# Altium PCB PCB1.PcbDoc (part 2 of 2)
Units mm, origin at the board's own origin, x right, y up, seen from the top; angles counter-clockwise.
Board outline 103.5 x 62.7 mm, 4 copper layers (Top Layer, Int1 (GND), Int2 (PWR), Bottom Layer), stack 1.369 mm thick; 71 components, 120 nets, 440 pads, 282 vias.
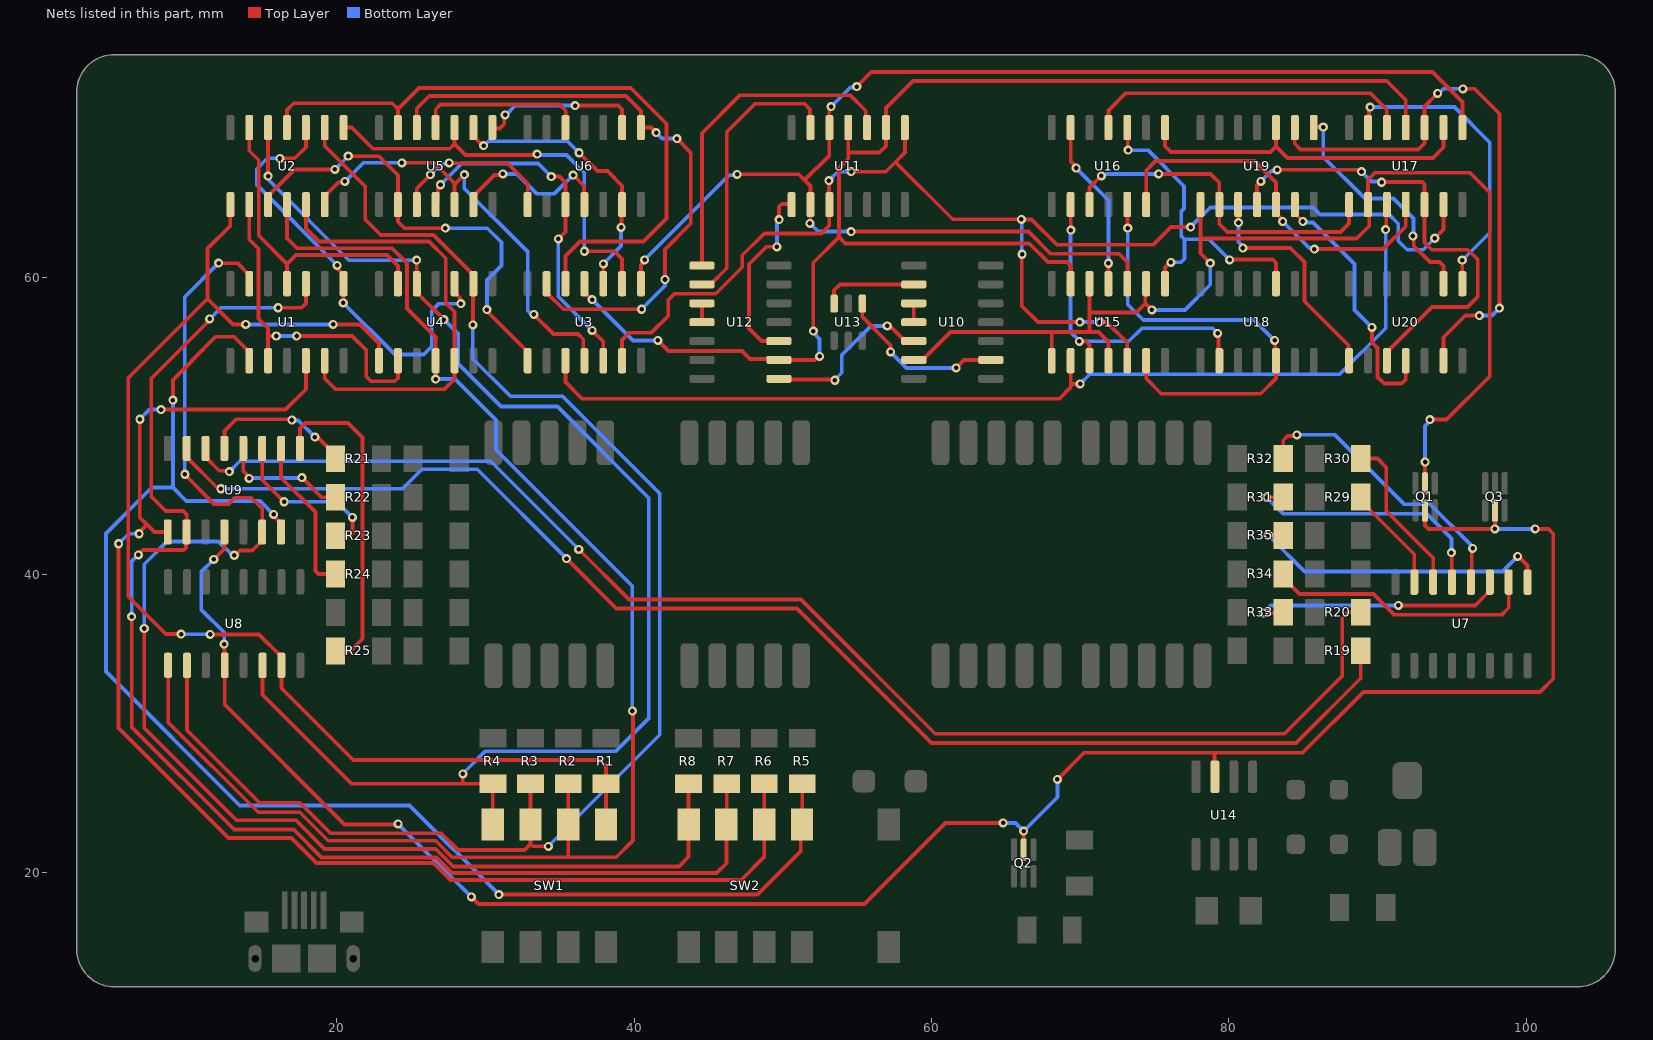
[diagram p4: the nets of this part, all layers, seen from the top]

## Via types
v1: diameter 0.61, hole 0.305, Top Layer to Bottom Layer, 282 vias

## Nets (pads, with @x,y where several pads share a name; then routed paths per layer and width w, separated by ;. In a path a pad name is that pad's centre, name@x,y a point inside that pad or via, vN(x,y) a via of type N, cw(c..) or ccw(c..) an arc to the next point about the centre after c; other vN are vias at no path point) (continued)
NetR19_2: R19.2 U9.15 | length 92.3
  Top Layer w0.254: U9.15@9.9,48.511 9.9,47.927 11.959,45.868 12.132,45.868 v1(12.2,45.8) ; v1(35.45,41.1) 38.8,37.75 50.95,37.75 60,28.7 84.525,28.7 88.875,33.05 R19.2@88.875,34.901
  Bottom Layer w0.254: v1(12.2,45.8) 24.425,45.8 25.732,47.107 29.443,47.107 v1(35.45,41.1)
NetR20_2: R20.2 U9.14 | length 92.3
  Top Layer w0.254: U9.14@11.17,48.511 11.17,47.927 12.089,47.007 12.718,47.007 v1(12.775,46.95) ; v1(36.275,41.725) 39.65,38.35 51.225,38.35 60.25,29.325 83.75,29.325 87.625,33.2 87.625,37.119 87.993,37.487 R20.2@88.875,37.487
  Bottom Layer w0.254: v1(12.775,46.95) 13.475,47.65 30.35,47.65 v1(36.275,41.725)
NetR21_2: R21.2 U9.13 | length 10.2
  Top Layer w0.254: U9.13@12.44,48.511 12.44,49.69 13.225,50.475 16.925,50.475 v1(16.975,50.425) ; v1(18.525,49.275) 18.593,49.207 18.767,49.207 19.908,48.065 R21.2@19.908,47.815
  Bottom Layer w0.254: v1(16.975,50.425) 17.006,50.394 17.406,50.394 v1(18.525,49.275)
NetR22_2: R22.2 U9.12 | length 8.5
  Top Layer w0.254: U9.12@13.71,48.511 13.71,46.986 14.1,46.596 v1(14.1,46.5) ; v1(17.65,46.55) 18.97,45.23 R22.2@19.908,45.23
  Bottom Layer w0.254: v1(14.1,46.5) 14.125,46.525 17.625,46.525 v1(17.65,46.55)
NetR23_2: R23.2 U9.11 | length 11.5
  Top Layer w0.254: U9.11@14.98,48.511 14.98,46.395 v1(16.45,44.925) ; R23.2@19.908,42.644 20.901,42.644 21.05,42.793 v1(21.05,43.875)
  Bottom Layer w0.254: v1(16.45,44.925) 20,44.925 v1(21.05,43.875)
NetR24_2: R24.2 U9.10 | length 10.6
  Top Layer w0.254: U9.10@16.25,48.511 16.25,46.545 18.565,44.23 18.565,40.26 18.766,40.059 R24.2@19.908,40.059
NetR25_2: R25.2 U9.9 | length 21.8
  Top Layer w0.254: U9.9@17.52,48.511 17.52,49.845 17.9,50.225 20.75,50.225 21.736,49.239 21.736,35.711 20.912,34.887 R25.2@19.908,34.887
NetR29_2: R29.2 U7.15 | length 7.2
  Top Layer w0.254: R29.2@88.875,45.243 88.875,44.993 92.475,41.393 U7.15@92.475,39.518
NetR30_2: R30.2 U7.14 | length 11
  Top Layer w0.254: R30.2@88.875,47.829 89.996,47.829 90.589,47.236 90.589,44.3 93.745,41.144 U7.14@93.745,39.518
NetR31_2: R31.2 U7.13 | length 17.7
  Top Layer w0.254: v1(82.541,45.229) 83.644,45.229 R31.2@83.658,45.243 ; v1(94.975,41.5) 94.995,41.48 94.995,39.538 U7.13@95.015,39.518
  Bottom Layer w0.254: v1(82.541,45.229) 83.645,44.125 93.3,44.125 94.975,42.45 v1(94.975,41.5)
NetR32_2: R32.2 U7.12 | length 19.7
  Top Layer w0.254: R32.2@83.658,47.829 83.658,49.058 83.957,49.357 84.507,49.357 v1(84.575,49.425) ; U7.12@96.285,39.518 96.342,39.575 96.342,41.736 v1(96.4,41.793)
  Bottom Layer w0.254: v1(84.575,49.425) 87.15,49.425 91.825,44.75 93.55,44.75 96.222,42.078 96.222,42.067 96.4,41.889 v1(96.4,41.793)
NetR33_2: R33.2 U7.11 | length 17.8
  Top Layer w0.254: v1(82.325,37.45) 83.622,37.45 R33.2@83.658,37.487 ; v1(91.4,37.95) 96.572,37.95 97.555,38.933 U7.11@97.555,39.518
  Bottom Layer w0.254: v1(82.325,37.45) 82.825,37.95 v1(91.4,37.95)
NetR34_2: R34.2 U7.10 | length 18.4
  Top Layer w0.254: R34.2@83.658,40.072 83.658,39.822 84.756,38.725 89.732,38.725 91.138,37.318 98.344,37.318 98.825,37.799 U7.10@98.825,39.518
NetR35_2: R35.2 U7.9 | length 21.3
  Top Layer w0.254: v1(82.65,42.675) 83.641,42.675 R35.2@83.658,42.658 ; v1(99.425,41.25) 99.475,41.25 100.095,40.63 U7.9@100.095,39.518
  Bottom Layer w0.254: v1(82.65,42.675) 85.1,40.225 98.4,40.225 v1(99.425,41.25)
NetU1_3: U1.3 U2.2 U4.2 | length 23.3
  Top Layer w0.254: U2.2@14.11,64.913 14.11,62.565 14.734,61.941 14.734,57.241 15.38,56.595 15.38,56.075 ; U1.3@15.38,54.413 15.38,56.075 ; v1(15.925,56.075) 15.38,56.075 ; v1(17.3,56.075) 21.025,56.075 21.975,55.125 21.975,53.35 22.3,53.025 23.9,53.025 24.11,53.235 U4.2@24.11,54.413
  Bottom Layer w0.254: v1(15.925,56.075) v1(17.3,56.075)
NetU1_6: U1.6 U2.5 U4.5 | length 30.7
  Top Layer w0.254: U2.5@17.92,64.913 17.92,63.305 18.8,62.425 26.2,62.425 27.326,61.299 27.326,58.299 27.92,57.705 U4.5@27.92,54.413 27.92,53.17 27.25,52.5 19.9,52.5 19.19,53.21 U1.6@19.19,54.413
NetU1_8: U1.8 U2.10 U4.10 | length 30.4
  Top Layer w0.254: v1(16.175,68.025) 17.175,68.025 17.92,68.77 U2.10@17.92,70.095 ; v1(20.025,60.825) 20.093,60.757 20.093,60.55 20.46,60.183 U1.8@20.46,59.595 20.447,59.582 20.447,58.316 v1(20.434,58.303) ; U4.10@27.92,59.595 27.92,59.007 28.282,58.645 28.282,58.318 v1(28.35,58.25)
  Bottom Layer w0.254: v1(16.175,68.025) 15.325,68.025 14.625,67.325 14.625,66.225 v1(20.025,60.825) ; v1(20.434,58.303) 23.912,54.825 25.85,54.825 26.387,55.363 26.387,57.762 26.875,58.25 v1(28.35,58.25)
NetU1_11: U1.11 U2.13 U4.13 | length 20.8
  Top Layer w0.254: U2.13@14.11,70.095 14.11,68.54 14.75,67.9 14.75,62.825 16.65,60.925 ; U1.11@16.65,59.595 16.65,60.925 ; U4.13@24.11,59.595 24.11,60.79 23.377,61.523 17.248,61.523 16.65,60.925
NetU2_3: U2.3 U3.1 U5.2 | length 31.1
  Top Layer w0.254: U2.3@15.38,64.913 15.38,65.498 17.157,67.275 v1(19.875,67.275) ; v1(20.768,68.168) 22.832,68.168 24.11,66.89 24.11,63.765 24.55,63.325 v1(27.3,63.325) ; v1(30.1,57.85) 30.168,57.782 30.168,57.669 32.84,54.998 U3.1@32.84,54.413
  Bottom Layer w0.254: v1@19.875,67.3 v1(19.875,67.275) v1(20.768,68.168) ; v1(27.3,63.325) 30.125,63.325 31.075,62.375 31.075,60.825 30.1,59.85 v1(30.1,57.85)
NetU2_6: U2.6 U3.4 U5.5 | length 30
  Top Layer w0.254: U2.6@19.19,64.913 19.19,65.498 20.099,66.407 20.482,66.407 v1(20.55,66.475) ; v1(24.375,67.725) 26.55,67.725 27.92,66.355 ; U5.5@27.92,64.913 27.92,66.27 v1(28.575,66.925) ; v1(33.25,57.525) 34.575,56.2 36.225,56.2 36.575,55.85 36.575,54.488 U3.4@36.65,54.413
  Bottom Layer w0.254: v1(20.55,66.475) 21.8,67.725 v1(24.375,67.725) ; v1(28.575,66.925) 28.575,66 32.85,61.725 32.85,57.775 33.1,57.525 v1(33.25,57.525)
NetU2_8: U2.8 U3.9 U5.10 | length 28.6
  Top Layer w0.254: U2.8@20.46,70.095 21.005,70.095 22.425,68.675 27.6,68.675 27.92,68.995 ; U5.10@27.92,70.095 27.92,68.995 ; v1(33.478,68.307) 33.421,68.25 28.665,68.25 27.92,68.995 ; v1(36.65,61.775) 38.675,61.775 39.19,61.26 U3.9@39.19,59.595
  Bottom Layer w0.254: v1(33.478,68.307) 33.535,68.25 35.45,68.25 36.65,67.05 v1(36.65,61.775)
NetU2_11: U2.11 U3.12 U5.13 | length 45.9
  Top Layer w0.254: U2.11@16.65,70.095 16.65,71.275 17.1,71.725 23.725,71.725 24.11,71.34 ; U5.13@24.11,70.095 24.11,71.34 ; U3.12@35.38,59.595 35.38,61.455 36.35,62.425 40.625,62.425 42.175,63.975 42.175,70.35 39.775,72.75 25.52,72.75 24.11,71.34
NetU5_3: U5.3 U6.1 | length 11.3
  Top Layer w0.254: U5.3@25.38,64.913 25.38,66.005 v1(26.3,66.925) ; v1(27.553,67.722) 27.575,67.7 31.475,67.7 32.84,66.335 U6.1@32.84,64.913
  Bottom Layer w0.254: v1(26.3,66.925) 27.029,67.654 27.485,67.654 v1(27.553,67.722)
NetU5_6: U5.6 U6.4 | length 11.3
  Top Layer w0.254: U5.6@29.19,64.913 29.19,65.498 30.599,66.907 31.107,66.907 v1(31.175,66.975) ; v1(35.9,66.9) 36.65,66.15 U6.4@36.65,64.913
  Bottom Layer w0.254: v1(31.175,66.975) 32.1,66.975 33.425,65.65 34.65,65.65 v1(35.9,66.9)
NetU5_8: U5.8 U6.9 | length 11
  Top Layer w0.254: U5.8@30.46,70.095 30.53,70.025 30.95,70.025 31.257,70.332 31.257,70.882 v1(31.325,70.95) ; v1(36.025,71.575) 38.925,71.575 39.19,71.31 U6.9@39.19,70.095
  Bottom Layer w0.254: v1(31.325,70.95) 31.375,70.95 32,71.575 v1(36.025,71.575)
NetU5_11: U5.11 U6.12 | length 11.4
  Top Layer w0.254: U5.11@26.65,70.095 26.65,71.325 26.975,71.65 34.975,71.65 35.4,71.225 35.4,70.115 U6.12@35.38,70.095
NetU10_2: U10.2 U13.6 | length 6.4
  Top Layer w0.254: U13.6@53.45,58.249 53.45,59.15 53.844,59.544 U10.2@58.809,59.544
NetU10_5: U10.5 U12.8 | length 11.8
  Top Layer w0.254: U12.8@49.741,53.194 49.788,53.147 53.453,53.147 v1(53.5,53.1) ; v1(57.025,56.75) 57.093,56.682 57.277,56.682 58.225,55.734 U10.5@58.809,55.734
  Bottom Layer w0.254: v1(53.5,53.1) 53.5,53.133 53.968,53.602 53.968,54.793 55.925,56.75 v1(57.025,56.75)
NetU10_9: U10.9 U13.4 | length 11.4
  Top Layer w0.254: U13.4@55.35,58.249 55.35,57.35 57.244,55.456 57.244,55.006 v1(57.25,55) ; v1(61.65,53.925) 62.189,54.464 U10.9@63.991,54.464
  Bottom Layer w0.254: v1(57.25,55) 58.325,53.925 v1(61.65,53.925)
NetU11_3: U11.3 U12.1 | length 22.6
  Top Layer w0.254: U12.1@44.559,60.814 44.559,69.709 47.125,72.275 54.525,72.275 55.575,71.225 55.575,70.19 U11.3@55.67,70.095
NetU11_6: U11.6 U12.2 | length 19.1
  Top Layer w0.254: U12.2@44.559,59.544 45.143,59.544 46.225,60.626 46.225,69.8 48.125,71.7 51.45,71.7 51.834,71.316 51.834,70.121 U11.6@51.86,70.095
NetU11_8: U11.8 U12.10 | length 12.7
  Top Layer w0.254: v1(49.6,62.075) 48.9,62.075 47.725,60.9 47.725,56.575 48.566,55.734 U12.10@49.741,55.734 ; v1(49.75,63.9) 49.75,64.775 49.925,64.95 50.553,64.95 U11.8@50.59,64.913
  Bottom Layer w0.254: v1(49.6,62.075) 49.6,63.654 49.75,63.804 v1(49.75,63.9)
NetU15_3: U15.3 U16.2 U18.2 | length 23
  Top Layer w0.254: U16.2@69.36,64.913 69.367,64.906 69.367,63.208 v1(69.375,63.2) ; v1@69.951,55.719 70.381,55.719 70.623,55.477 70.623,54.42 U15.3@70.63,54.413 ; v1(79.25,56.25) 79.305,56.195 79.305,54.468 U18.2@79.36,54.413
  Bottom Layer w0.254: v1(69.375,63.2) 69.353,63.178 69.353,56.347 69.95,55.75 v1(69.95,55.718) 73.268,55.718 74.15,56.6 78.9,56.6 v1(79.25,56.25)
NetU15_6: U15.6 U16.5 U18.5 | length 31
  Top Layer w0.254: U16.5@73.17,64.913 73.185,64.898 73.185,63.34 v1(73.2,63.325) ; U15.6@74.44,54.413 74.44,53.21 75.457,52.193 82.143,52.193 83.17,53.22 U18.5@83.17,54.413 83.123,54.461 83.123,55.727 v1(83.075,55.775)
  Bottom Layer w0.254: v1(73.2,63.325) 73.2,58.2 74.25,57.15 81.7,57.15 v1(83.075,55.775)
NetU15_8: U15.8 U16.10 U18.10 | length 22.2
  Top Layer w0.254: U16.10@73.17,70.095 73.197,70.067 73.197,68.602 v1(73.225,68.575) ; U15.8@75.71,59.595 75.71,60.685 76.05,61.025 v1(76.1,61.025) ; v1(80.05,61.2) 80.075,61.225 82.95,61.225 83.17,61.005 U18.10@83.17,59.595
  Bottom Layer w0.254: v1(73.225,68.575) 74.568,68.575 76.993,66.15 76.993,64.652 76.793,64.451 76.793,62.81 77.025,62.578 ; v1(76.1,61.025) 76.111,61.036 76.786,61.036 77.025,61.275 77.025,62.578 ; v1(80.05,61.2) 78.672,62.578 77.025,62.578
NetU15_11: U15.11 U16.13 | length 11.6
  Top Layer w0.254: U16.13@69.36,70.095 69.36,67.836 69.725,67.471 v1(69.725,67.375) ; U15.11@71.9,59.595 v1(71.9,60.968)
  Bottom Layer w0.254: v1(69.725,67.375) 71.9,65.2 v1(71.9,60.968)
NetU16_3: U16.3 U17.1 U19.2 | length 23.7
  Top Layer w0.254: U16.3@70.63,64.913 70.63,66.055 v1(71.425,66.85) ; v1(75.275,66.975) 78.775,66.975 79.36,66.39 U19.2@79.36,64.913 79.36,63.615 79.907,63.068 87.518,63.068 88.09,63.64 U17.1@88.09,64.913
  Bottom Layer w0.254: v1(71.425,66.85) 71.493,66.918 71.695,66.918 71.752,66.975 v1(75.275,66.975)
NetU16_6: U16.6 U17.4 U19.5 | length 25.8
  Top Layer w0.254: U16.6@74.44,64.913 74.44,67.215 75.075,67.85 81.725,67.85 83.17,66.405 U19.5@83.17,64.913 83.17,64.326 83.625,63.871 v1(83.625,63.775) ; v1(85.75,61.925) 90.375,61.925 91.9,63.45 U17.4@91.9,64.913
  Bottom Layer w0.254: v1(83.625,63.775) 85.407,61.993 85.682,61.993 v1(85.75,61.925)
NetU16_8: U16.8 U17.9 U19.10 | length 23.5
  Top Layer w0.254: U16.8@75.71,70.095 75.71,68.84 76.1,68.45 82.8,68.45 83.17,68.82 ; U19.10@83.17,70.095 83.17,68.82 ; U17.9@94.44,70.095 94.44,68.765 93.725,68.05 83.94,68.05 83.17,68.82
NetU16_11: U16.11 U17.12 | length 22
  Top Layer w0.254: U16.11@71.9,70.095 71.9,71.25 73.05,72.4 89.525,72.4 90.63,71.295 U17.12@90.63,70.095
NetU19_3: U19.3 U20.1 | length 15.5
  Top Layer w0.254: U19.3@80.63,64.913 80.64,64.903 80.64,63.71 v1(80.65,63.7) ; v1(80.95,61.993) 84.132,61.993 85.083,61.042 85.083,58.417 88.053,55.447 88.053,54.45 U20.1@88.09,54.413
  Bottom Layer w0.254: v1(80.65,63.7) 80.65,62.389 80.95,62.089 v1(80.95,61.993)
NetU19_6: U19.6 U20.4 | length 17.7
  Top Layer w0.254: U19.6@84.44,64.913 84.44,64.326 84.975,63.791 v1(84.975,63.775) ; v1(89.625,56.65) 89.625,55.65 90,55.275 90,53.325 90.45,52.875 91.625,52.875 91.9,53.15 U20.4@91.9,54.413
  Bottom Layer w0.254: v1(84.975,63.775) 85.036,63.714 85.661,63.714 88.45,60.925 88.45,57.825 v1(89.625,56.65)
NetU19_8: U19.8 U20.9 | length 16.1
  Top Layer w0.254: U19.8@85.71,70.095 85.74,70.125 v1(86.35,70.125) ; v1(92.375,62.8) 92.443,62.732 92.443,62.132 93.525,61.05 94.165,61.05 94.44,60.775 U20.9@94.44,59.595
  Bottom Layer w0.254: v1(86.35,70.125) 86.35,68.125 89.15,65.325 91.075,65.325 92.42,63.98 92.42,62.845 v1(92.375,62.8)
O1Y: U3.5 U5.4 U6.3 | length 24.4
  Top Layer w0.254: U5.4@26.65,64.913 26.786,65.049 26.786,65.965 26.975,66.154 v1(26.975,66.25) ; v1(34.425,66.8) 34.975,66.8 35.38,66.395 U6.3@35.38,64.913 35.38,63.09 34.9,62.61 v1(34.9,62.6) ; v1(37.175,56.45) 37.92,55.705 U3.5@37.92,54.413
  Bottom Layer w0.254: v1(26.975,66.25) 28.4,67.675 33.55,67.675 v1(34.425,66.8) ; v1(34.9,62.6) 34.9,58.725 v1(37.175,56.45)
O1Y1: U17.5 U19.4 U20.3 | length 32.1
  Top Layer w0.254: U19.4@81.9,64.913 81.9,66.225 v1(82.15,66.475) ; v1(83.25,67.25) 88.704,67.25 88.829,67.125 v1(88.925,67.125) ; v1(90.275,66.418) 90.282,66.425 93,66.425 93.17,66.255 U17.5@93.17,64.913 93.17,62.355 93.65,61.875 96.075,61.875 96.75,61.2 96.75,58.725 96.05,58.025 93.657,58.025 90.63,54.998 U20.3@90.63,54.413
  Bottom Layer w0.254: v1(82.15,66.475) 82.857,67.182 83.182,67.182 v1(83.25,67.25) ; v1(88.925,67.125) 89.589,66.461 90.232,66.461 v1(90.275,66.418)
O2Y: U3.10 U5.9 U6.6 | length 19.3
  Top Layer w0.254: U5.9@29.19,70.095 29.19,69.514 29.822,68.882 v1(29.875,68.882) ; v1(36.3,68.4) 37.525,67.175 38.2,67.175 39.19,66.185 U6.6@39.19,64.913 39.158,64.881 39.158,63.408 v1(39.125,63.375) ; U3.10@37.92,59.595 37.922,59.597 37.922,60.922 v1(37.925,60.925)
  Bottom Layer w0.254: v1(29.875,68.882) 29.908,68.882 30.202,69.175 35.525,69.175 v1(36.3,68.4) ; v1(37.925,60.925) 39.125,62.125 v1(39.125,63.375)
O2Y1: U17.10 U19.9 U20.6 | length 38.1
  Top Layer w0.254: U19.9@84.44,70.095 84.44,69.01 84.825,68.625 92.739,68.625 93.154,69.04 93.154,70.079 U17.10@93.17,70.095 93.17,71.52 v1(94.05,72.4) ; U20.6@94.44,54.413 94.44,55.99 95.9,57.45 v1(96.85,57.45) ; v1(95.75,72.7) 96.525,72.7 98.2,71.025 v1(98.2,57.95)
  Bottom Layer w0.254: v1(94.05,72.4) 94.146,72.4 94.446,72.7 v1(95.75,72.7) ; v1(96.85,57.45) 97.7,57.45 v1(98.2,57.95)
O3Y: U3.13 U5.12 U6.8 | length 41.6
  Top Layer w0.254: U5.12@25.38,70.095 25.38,71.38 26.224,72.224 39.451,72.224 40.46,71.215 40.46,70.207 U6.8@40.46,70.095 41.13,70.095 v1(41.475,69.75) ; U3.13@34.11,59.595 34.11,59.011 35.246,57.875 v1(40.5,57.875) ; v1(42.075,59.875) 42.075,61.9 43.8,63.625 43.8,68.425 v1(42.875,69.35)
  Bottom Layer w0.254: v1(40.5,57.875) 42.075,59.45 v1(42.075,59.875) ; v1(41.475,69.75) 41.875,69.35 v1(42.875,69.35)
O3Y1: U17.13 U20.8 | length 20.7
  Top Layer w0.254: U17.13@89.36,70.095 89.432,70.167 89.432,71.407 v1(89.5,71.475) ; v1(95.7,61.175) 95.705,61.17 95.705,59.6 U20.8@95.71,59.595
  Bottom Layer w0.254: v1(89.5,71.475) 95.175,71.475 97.55,69.1 97.55,63.025 v1(95.7,61.175)
PWM: Q1.2 Q2.2 Q3.2 U8.4 U9.4 U14.3 | length 139.1
  Top Layer w0.254: v1(11.725,41.05) 12.44,41.765 U9.4@12.44,42.897 ; v1(12.425,35.35) 12.445,35.33 12.445,33.942 U8.4@12.465,33.922 12.465,31.285 20.525,23.225 24.093,23.225 v1(24.125,23.257) ; v1(29.05,18.35) 29.056,18.35 29.538,17.868 55.493,17.868 60.95,23.325 v1(64.825,23.325) ; Q2.2@66.2,21.526 v1(66.2,22.775) ; v1(68.475,26.25) 70.275,28.05 79.038,28.05 ; U14.3@79.065,26.425 79.038,26.452 79.038,28.05 ; Q1.2@93.2,44.353 93.2,43.325 93.425,43.1 v1(97.9,43.1) Q3.2@97.9,44.353 ; v1(100.6,43.1) 101.5,43.1 101.825,42.775 101.825,33.025 100.925,32.125 89.05,32.125 84.975,28.05 79.038,28.05
  Bottom Layer w0.254: v1(11.725,41.05) 10.875,40.2 10.875,37.675 12.425,36.125 v1(12.425,35.35) ; v1(24.125,23.257) 28.368,19.014 28.386,19.014 v1(29.05,18.35) ; v1(64.825,23.325) 65.65,23.325 v1(66.2,22.775) 68.475,25.05 v1(68.475,26.25) ; v1(97.9,43.1) v1(100.6,43.1)
T: Q1.5 U10.6 U15.1 U15.4 U15.9 U15.12 U17.2 U19.1 | length 82.7
  Top Layer w0.254: U10.6@58.809,54.464 59.393,54.464 61.279,56.35 68.088,56.35 ; U15.1@68.088,54.415 68.088,56.35 ; U15.12@70.63,59.595 70.63,57.647 ; U15.4@71.9,54.413 71.9,55.675 71.225,56.35 70.61,56.35 ; U15.9@74.44,59.595 74.375,59.53 74.375,58.25 ; v1(74.825,57.825) 74.4,58.25 74.375,58.25 ; U19.1@78.09,64.913 78.09,62.625 ; v1(78.75,60.975) 78.09,61.635 78.09,62.625 ; Q1.5@93.2,46.155 v1(93.2,47.6) ; v1(93.525,50.45) 94.65,50.45 97.55,53.35 97.55,65.725 96.225,67.05 89.825,67.05 89.355,66.58 89.355,66.15 89.36,66.145 U17.2@89.36,64.913 89.45,64.823 89.45,63.475 88.6,62.625 78.09,62.625 ; 68.088,56.35 70.61,56.35 ; 70.61,56.35 70.63,56.37 70.63,57.647 ; 70.63,57.647 73.772,57.647 74.375,58.25
  Bottom Layer w0.254: v1(74.825,57.825) 77.05,57.825 78.75,59.525 v1(78.75,60.975) ; v1(93.2,47.6) 93.2,50.029 93.525,50.354 v1(93.525,50.45)
U10_1Y: U10.3 U10.4 | length 1.3
  Top Layer w0.254: U10.4@58.809,57.004 U10.3@58.809,58.274
U12_1Y: U12.3 U12.4 | length 1.3
  Top Layer w0.254: U12.4@44.559,57.004 U12.3@44.559,58.274
X0: R1.1 SW1.5 U2.1 U4.1 U8.7 | length 85.2
  Top Layer w0.254: v1(9.525,36.025) 8.5,36.025 5.975,38.55 5.975,53.25 11.3,58.575 ; v1(11.475,36) 14.77,36 16.127,34.642 16.136,34.642 16.275,34.503 16.275,32.375 21.1,27.55 37.7,27.55 38.1,27.15 R1.1@38.1,25.954 38.1,23.24 SW1.5@38.11,23.23 ; U2.1@12.84,64.913 12.84,63.49 11.3,61.95 11.3,58.575 ; v1(13.875,56.85) 13.025,56.85 11.3,58.575 ; v1(19.75,56.85) 21.55,56.85 22.84,55.56 U4.1@22.84,54.413
  Bottom Layer w0.254: v1(9.525,36.025) 9.537,36.013 11.462,36.013 v1(11.475,36) ; v1(13.875,56.85) v1(19.75,56.85)
X1: R2.2 SW1.6 U2.4 U4.4 U8.1 | length 101.3
  Top Layer w0.254: U8.1@8.655,33.922 8.655,30.095 14.713,24.037 17.512,24.037 19.425,22.125 26.65,22.125 27.756,21.019 35.574,21.019 ; U2.4@16.65,64.913 16.65,62.65 17.318,61.982 23.718,61.982 24.725,60.975 24.725,57.925 26.675,55.975 26.663,55.963 U4.4@26.663,54.426 ; v1(26.65,53.175) U4.4@26.65,54.413 U4.4@26.663,54.426 ; U4.4@26.704,54.468 U4.4@26.663,54.426 ; R2.2@35.57,25.949 SW1.6@35.57,23.23 35.57,21.023 35.574,21.019 ; v1(39.875,30.85) 39.925,30.8 39.925,22.15 38.794,21.019 35.574,21.019
  Bottom Layer w0.254: v1(26.65,53.175) 27.952,53.175 30.7,50.427 30.7,48.425 39.875,39.25 v1(39.875,30.85)
X2: R3.2 SW1.7 U2.9 U4.9 U8.2 | length 101.2
  Top Layer w0.254: U8.2@9.925,33.922 9.925,29.55 14.8,24.675 17.525,24.675 19.575,22.625 27.025,22.625 28.145,21.505 32.637,21.505 33.03,21.898 ; U2.9@19.19,70.095 19.19,68.853 21.915,66.129 21.915,63.91 22.95,62.875 26.494,62.875 29.19,60.179 U4.9@29.19,59.595 29.17,59.575 29.17,56.845 v1(29.15,56.825) ; R3.2@33.025,25.954 33.025,23.235 SW1.7@33.03,23.23 33.03,21.898 ; v1(34.225,21.75) 33.178,21.75 33.03,21.898
  Bottom Layer w0.254: v1(29.15,56.825) 29.15,54.55 31.682,52.018 35.182,52.018 41.725,45.475 41.725,29.25 v1(34.225,21.75)
X3: R4.2 SW1.8 U2.12 U4.12 U8.6 | length 92.7
  Top Layer w0.254: U8.6@15.005,33.922 15.005,31.945 20.996,25.954 28.454,25.954 ; U2.12@15.38,70.095 U2.12@15.38,70.095 15.381,66.826 v1(15.382,66.825) ; v1(25.375,61.175) 25.378,61.172 25.378,59.597 U4.12@25.38,59.595 25.38,59.007 27.2,57.187 v1(27.2,57.175) ; v1(28.475,26.625) 28.475,25.975 28.454,25.954 ; SW1.8@30.49,23.23 30.49,25.944 R4.2@30.5,25.954 28.454,25.954
  Bottom Layer w0.254: v1(15.382,66.825) 15.45,66.757 15.45,66.525 20.8,61.175 v1(25.375,61.175) ; v1(27.2,57.175) 28.175,56.2 28.175,54.2 31.05,51.325 34.85,51.325 40.975,45.2 40.975,30.35 38.775,28.15 30,28.15 v1(28.475,26.625)
Y0: R5.1 SW2.5 U1.2 U9.7 | length 97.3
  Top Layer w0.254: v1(8.975,51.757) 8.975,53.125 10.25,54.4 10.25,54.425 11.85,56.025 13.083,56.025 14.11,54.998 U1.2@14.11,54.413 ; v1(15.75,44.075) 15.75,43.985 16.25,43.485 U9.7@16.25,42.897 ; v1(30.9,18.5) 48.3,18.5 51.2,21.4 51.2,23.145 SW2.5@51.285,23.23 51.3,23.245 R5.1@51.3,25.954
  Bottom Layer w0.254: v1(8.975,51.757) 8.975,45.875 ; v1(15.75,44.075) 14.85,44.975 9.875,44.975 8.975,45.875 ; v1(30.9,18.5) 24.9,24.5 13.475,24.5 4.475,33.5 4.475,42.8 7.55,45.875 8.975,45.875
Y1: R6.2 SW2.6 U1.5 U9.1 | length 90.9
  Top Layer w0.254: v1(5.325,42.1) 5.325,29.7 12.725,22.3 16.95,22.3 18.631,20.619 26.506,20.619 27.65,19.475 47.2,19.475 48.745,21.02 SW2.6@48.745,23.23 48.75,23.235 R6.2@48.75,25.954 ; v1(6.7,42.775) 6.7,42.847 7.239,43.386 ; v1(6.75,50.475) 6.75,43.875 7.239,43.386 ; v1(8.175,51.125) 16.55,51.125 17.92,52.495 U1.5@17.92,54.413 ; U9.1@8.63,42.897 7.728,42.897 7.239,43.386
  Bottom Layer w0.254: v1(5.325,42.1) 6,42.775 v1(6.7,42.775) ; v1(6.75,50.475) 7.4,51.125 v1(8.175,51.125)
Y2: R7.2 SW2.7 U1.10 U9.2 | length 91.8
  Top Layer w0.254: v1(6.2,37.2) 6.2,29.775 13.1,22.875 17.1,22.875 18.975,21 26.697,21 27.747,19.95 45.55,19.95 46.205,20.605 SW2.7@46.205,23.23 46.225,23.25 R7.2@46.225,25.954 ; v1(6.65,41.35) 6.65,41.375 6.95,41.675 9.7,41.675 9.85,41.825 9.85,42.847 U9.2@9.9,42.897 9.9,44.075 9.675,44.3 8.5,44.3 7.525,45.275 7.525,53.225 11.45,57.15 v1(11.45,57.225) ; v1(16.05,57.975) 17.625,57.975 17.92,58.27 U1.10@17.92,59.595
  Bottom Layer w0.254: v1(6.2,37.2) 6.2,40.9 v1(6.65,41.35) ; v1(11.45,57.225) 12.2,57.975 v1(16.05,57.975)
Y3: R8.2 SW2.8 U1.13 U9.6 | length 92.9
  Top Layer w0.254: v1(7.05,36.4) 7.05,29.7 13.25,23.5 17.25,23.5 19.175,21.575 26.661,21.575 27.836,20.4 43.023,20.4 43.665,21.042 SW2.8@43.665,23.23 43.65,23.245 R8.2@43.65,25.954 ; v1(9.775,46.775) 9.775,46.75 11.775,44.75 12.675,44.75 13.125,45.2 14.25,45.2 14.98,44.47 U9.6@14.98,42.897 14.98,42.313 14.317,41.65 13.496,41.65 13.171,41.325 v1(13.1,41.325) ; v1(12.05,60.975) 13.314,60.975 14.11,60.179 U1.13@14.11,59.595
  Bottom Layer w0.254: v1(7.05,36.4) 7.05,40.725 8.575,42.25 12.05,42.25 12.975,41.325 v1(13.1,41.325) ; v1(9.775,46.775) 9.775,58.7 v1(12.05,60.975)
Z0: U3.3 U15.2 U17.3 | length 69
  Top Layer w0.254: U3.3@35.38,54.413 35.38,52.97 36.491,51.859 68.611,51.859 69.36,52.609 U15.2@69.36,54.413 ; 69.479,52.85 v1(70,52.85) ; v1(90.55,63.225) 90.59,63.265 90.59,64.873 U17.3@90.63,64.913
  Bottom Layer w0.254: v1(70,52.85) 70.65,53.5 87.45,53.5 90.55,56.6 v1(90.55,63.225)
Z1: U3.6 U11.1 U11.10 U15.5 U17.6 | length 89.7
  Top Layer w0.254: U3.6@39.19,54.413 39.19,55.815 39.675,56.3 41.175,56.3 42.3,57.425 42.3,58.5 42.717,58.917 45.492,58.917 47.275,60.7 47.275,61.5 48.75,62.975 52.6,62.975 53.125,63.5 53.125,64.908 U11.10@53.13,64.913 53.115,64.928 53.115,66.51 v1(53.1,66.525) ; v1(54.6,67.125) 56.925,67.125 57.567,67.767 ; U11.1@58.21,70.095 58.21,68.41 57.567,67.767 ; v1(66.1,61.575) 66.075,61.55 66.075,58.1 67.16,57.015 v1(69.985,57.015) ; v1(71.325,57.015) 71.335,57.025 71.775,57.025 73.17,55.63 U15.5@73.17,54.413 ; v1(77.425,63.4) 76.107,63.4 74.925,62.218 68.432,62.218 66.736,63.914 66.061,63.914 v1(66.05,63.925) 61.425,63.925 57.583,67.767 57.567,67.767 ; v1(93.85,62.65) 94.44,63.24 U17.6@94.44,64.913
  Bottom Layer w0.254: v1(53.1,66.525) 53.7,67.125 v1(54.6,67.125) ; v1(66.05,63.925) 66.075,63.9 66.075,61.6 v1(66.1,61.575) ; v1(69.985,57.015) v1(71.325,57.015) ; v1(77.425,63.4) 78.75,64.725 85.657,64.725 86.132,64.25 90.775,64.25 91.4,63.625 91.4,62.475 92,61.875 93.075,61.875 v1(93.85,62.65)
Z2: U3.8 U11.5 U11.9 U15.10 U17.8 | length 93.6
  Top Layer w0.254: U3.8@40.46,59.595 40.46,60.864 40.7,61.104 v1(40.7,61.2) ; v1(46.925,66.95) 51.075,66.95 51.467,66.557 ; v1(51.825,63.65) 51.842,63.668 51.842,64.896 U11.9@51.86,64.913 51.86,66.165 51.467,66.557 ; v1(53.25,71.5) 53.25,71.404 53.13,71.284 U11.5@53.13,70.095 53.13,68.22 51.467,66.557 ; v1(54.6,63.1) 66.525,63.1 68.025,61.6 72.625,61.6 73.17,61.055 U15.10@73.17,59.595 ; v1(54.975,72.85) 55.95,73.825 93.7,73.825 95.71,71.815 U17.8@95.71,70.095
  Bottom Layer w0.254: v1(40.7,61.2) 46.382,66.882 46.857,66.882 v1(46.925,66.95) ; v1(51.825,63.65) 51.831,63.65 52.381,63.1 v1(54.6,63.1) ; v1(53.25,71.5) 54.532,72.782 54.907,72.782 v1(54.975,72.85)
Z3: U3.11 U11.2 U11.4 U12.9 U15.13 U17.11 | length 95.9
  Top Layer w0.254: U3.11@36.65,59.595 36.65,59.014 37.139,58.525 v1(37.175,58.525) ; v1(41.6,55.775) 42.309,55.066 47.259,55.066 47.8,54.525 49.68,54.525 U12.9@49.741,54.464 52.143,54.464 52.379,54.7 v1(52.475,54.7) ; v1(52.05,56.4) 52.05,61 53.775,62.725 ; U11.4@54.4,70.095 54.4,68.417 ; U15.13@69.36,59.595 69.36,60.815 69.125,61.05 67.83,61.05 66.58,62.3 54.2,62.3 53.775,62.725 ; U17.11@91.9,70.095 91.9,71.95 90.625,73.225 58.75,73.225 56.94,71.415 U11.2@56.94,70.095 56.94,68.865 56.492,68.417 54.4,68.417 ; 53.775,62.725 53.775,67.375 54.4,68 54.4,68.417
  Bottom Layer w0.254: v1(37.175,58.525) 39.925,55.775 v1(41.6,55.775) ; v1(52.05,56.4) 52.05,56.304 52.475,55.879 v1(52.475,54.7)
pads on no net: J1.2 J1.3 J1.4 SS1.5 SS2.5 SS3.1 SS3.2 SS3.5 SS3.7 SS3.9 SS4.5 U7.1 U7.2 U7.4 U7.6 U7.7 U10.11 U10.12 U10.13 U11.11 U11.12 U11.13 U12.11 U12.12 U12.13 U13.5 U14.5 U18.11 U18.12 U18.13 U19.11 U19.12 U19.13 U20.11 U20.12 U20.13

## Polygon pours and split planes (outlines as drawn)
GND on Int1 (GND) (split plane): 103.659,74.482 103.856,74.453 104.05,74.404 104.238,74.337 104.418,74.252 104.589,74.149 104.749,74.031 104.897,73.897 105.031,73.749 105.149,73.589 105.252,73.418 105.337,73.238 105.404,73.05 105.453,72.856 105.482,72.659 105.491,72.476 105.49,72.46 105.49,14.84 105.491,14.824 105.482,14.641 105.453,14.444 105.404,14.25 105.337,14.062 105.252,13.882 105.149,13.711 105.031,13.551 104.897,13.403 104.749,13.269 104.589,13.151 104.418,13.048 104.238,12.963 104.05,12.896 103.856,12.847 103.659,12.818 103.476,12.809 103.46,12.81 5.04,12.81 5.024,12.809 4.841,12.818 4.644,12.847 4.45,12.896 4.262,12.963 4.082,13.048 3.911,13.151 3.751,13.269 3.603,13.403 3.469,13.551 3.351,13.711 3.248,13.882 3.163,14.062 3.096,14.25 3.047,14.444 3.018,14.641 3.009,14.824 3.01,14.84 3.01,72.46 3.009,72.476 3.018,72.659 3.047,72.856 3.096,73.05 3.163,73.238 3.248,73.418 3.351,73.589 3.469,73.749 3.603,73.897 3.751,74.031 3.911,74.149 4.082,74.252 4.262,74.337 4.45,74.404 4.644,74.453 4.841,74.482 5.024,74.491 5.04,74.49 102.2,74.49 103.46,74.49 103.476,74.491
5V on Int2 (PWR) (split plane): 103.659,74.482 103.856,74.453 104.05,74.404 104.238,74.337 104.418,74.252 104.589,74.149 104.749,74.031 104.897,73.897 105.031,73.749 105.149,73.589 105.252,73.418 105.337,73.238 105.404,73.05 105.453,72.856 105.482,72.659 105.491,72.476 105.49,72.46 105.49,14.84 105.491,14.824 105.482,14.641 105.453,14.444 105.404,14.25 105.337,14.062 105.252,13.882 105.149,13.711 105.031,13.551 104.897,13.403 104.749,13.269 104.589,13.151 104.418,13.048 104.238,12.963 104.05,12.896 103.856,12.847 103.659,12.818 103.476,12.809 103.46,12.81 5.04,12.81 5.024,12.809 4.841,12.818 4.644,12.847 4.45,12.896 4.262,12.963 4.082,13.048 3.911,13.151 3.751,13.269 3.603,13.403 3.469,13.551 3.351,13.711 3.248,13.882 3.163,14.062 3.096,14.25 3.047,14.444 3.018,14.641 3.009,14.824 3.01,14.84 3.01,72.46 3.009,72.476 3.018,72.659 3.047,72.856 3.096,73.05 3.163,73.238 3.248,73.418 3.351,73.589 3.469,73.749 3.603,73.897 3.751,74.031 3.911,74.149 4.082,74.252 4.262,74.337 4.45,74.404 4.644,74.453 4.841,74.482 5.024,74.491 5.04,74.49 102.2,74.49 103.46,74.49 103.476,74.491

## Silkscreen, mask and mechanical layers (free items; w line width, h text height)
Top Overlay:
  text "+" at 39.954,41.379 h3
  text "=" at 54.954,39.629 h3
  text "-" at 39.954,39.129 h3
  text "-" at 60.454,19.879 h3
  text "+" at 60.454,15.129 h3

## Text inside footprints (layer, text, board x,y; h text height)
J1: Mechanical 13 "PCB END" at 22.55,12.9 h0.41